# EAGLE board lab9 (EAGLE 7.6.0)

Size 56.82 x 53.33 mm. Coordinates in mm from the lower left corner, seen from the top.
Outline: 0,0 56.82,0 56.82,53.33 0,53.33 0,0
Copper layers (1*16): Top 0.035mm / dielectric 1.5mm / Bottom 0.035mm
Design rules "default": minimum track width 10mil, minimum drill 24mil, track to track 8mil, track to pad 8mil, pad to pad 8mil, via to via 8mil, smd to smd 8mil, copper to edge 40mil, drill to drill 8mil, minimum pad ring 10mil, minimum via ring 8mil, stop-mask expansion 4mil, vias tented up to drill 0mil, thermal gap 10mil

## Footprints (pad centres in the part's own frame; a part is rotated, then mirrored left to right if it is on the bottom)
C5B2.5 = drill 0.813 pad 1.6 octagon: 1 -2.54,0; 2 2.54,0
DC-POWER = drill 0.889 pad 2.54 octagon: + 0,2.54; - 0,-2.54
2P-2.54-65/35MIL = drill 0.889 pad 1.651 square: 1 0,1.27 | drill 0.889 pad 1.651: 2 0,-1.27
0207/10 = drill 0.813 octagon: 1 -5.08,0; 2 5.08,0
DIL08 = drill 0.813 pad 1.27: 1 -3.81,-3.81; 2 -1.27,-3.81; 3 1.27,-3.81; 4 3.81,-3.81; 5 3.81,3.81; 6 1.27,3.81; 7 -1.27,3.81; 8 -3.81,3.81

## Placement (x,y rotation side)
C1  1uF  [C5B2.5]  5,35.48 0 top
FUNC1  [DC-POWER]  5,73.58 0 top  (outside the outline)
FUNC2  [DC-POWER]  5,124.38 0 top  (outside the outline)
FUNC3  [DC-POWER]  5,213.28 0 top  (outside the outline)
FUNC4  [DC-POWER]  5,251.38 0 top  (outside the outline)
P1  14V  [2P-2.54-65/35MIL]  5,48.18 0 top
P2  14V  [2P-2.54-65/35MIL]  5,60.88 0 top  (outside the outline)
P3  14V  [2P-2.54-65/35MIL]  5,98.98 0 top  (outside the outline)
P4  14V  [2P-2.54-65/35MIL]  5,111.68 0 top  (outside the outline)
P5  14V  [2P-2.54-65/35MIL]  5,225.98 0 top  (outside the outline)
P6  14V  [2P-2.54-65/35MIL]  5,238.68 0 top  (outside the outline)
R1  1k‎Ω  [0207/10]  5,22.78 0 top
R2  1k‎Ω  [0207/10]  5,149.78 0 top  (outside the outline)
R3  4.3k‎Ω  [0207/10]  5,162.48 0 top  (outside the outline)
R4  1k‎Ω  [0207/10]  5,264.08 0 top  (outside the outline)
R5  300‎Ω  [0207/10]  5,276.78 0 top  (outside the outline)
R6  200‎Ω  [0207/10]  5,289.48 0 top  (outside the outline)
U1  [DIL08]  5,10.08 0 top
U2  [DC-POWER]  5,86.28 0 top  (outside the outline)
U3  [DC-POWER]  5,137.08 0 top  (outside the outline)
U4  [DIL08]  5,175.18 0 top  (outside the outline)
U5  [DIL08]  5,187.88 0 top  (outside the outline)
U6  [DC-POWER]  5,200.58 0 top  (outside the outline)
U7  [DC-POWER]  5,302.18 0 top  (outside the outline)

## Library data of the parts
C1 FUNC1-FUNC4 P1-P6 R1-R6 U1-U7 = AUTODESK_CIRCUITS_BREADBOARD

## Nets
N$1: C1.2 U1.6 U2.+
N$2: U1.5
N$3: P1.2 U1.4
N$4: U1.1
N$5: U1.8
N$6: FUNC1.- P1.1 P2.1 U1.3 U2.-
N$7: P2.2 U1.7
N$8: C1.1 R1.2 U1.2
N$9: FUNC1.+ R1.1
N$11: R4.2 U5.6 U7.+
N$12: U5.5
N$13: P6.2 U5.4
N$14: U5.1
N$15: U5.8
N$16: FUNC3.- FUNC4.- P5.2 P6.1 U5.3 U7.-
N$17: P5.1 U5.7
N$18: U5.2
N$19: R4.1 R5.1 R6.2
N$20: FUNC3.+ R6.1
N$21: FUNC4.+ R5.2
N$22: R3.2 U3.+ U4.6
N$23: U4.5
N$24: P4.2 U4.4
N$25: U4.1
N$26: U4.8
N$27: FUNC2.- P3.2 P4.1 U3.- U4.3 U6.-
N$28: P3.1 U4.7
N$29: R2.2 R3.1 U4.2
N$30: FUNC2.+ R2.1 U6.+

## Tracks (layer width: path | path; a pad name or v marks a point on that pad's centre or on a via)
N$1  (2 unrouted)
N$3  (1 unrouted)
N$6  (4 unrouted)
N$7  (1 unrouted)
N$8  (2 unrouted)
N$9  (1 unrouted)
N$11  (2 unrouted)
N$13  (1 unrouted)
N$16  (5 unrouted)
N$17  (1 unrouted)
N$19  (2 unrouted)
N$20  (1 unrouted)
N$21  (1 unrouted)
N$22  (2 unrouted)
N$24  (1 unrouted)
N$27  (5 unrouted)
N$28  (1 unrouted)
N$29  (2 unrouted)
N$30  (2 unrouted)